# Altium PCB Peripheral.PcbDoc
Units mil, origin at the board's own origin, x right, y up, seen from the top; angles counter-clockwise.
Board outline 1750 x 2500 mil, 4 copper layers (Top Layer, Layer 1, Layer 2, Bottom Layer), stack 23.756 mil thick; 31 components, 22 nets, 98 pads, 30 vias.
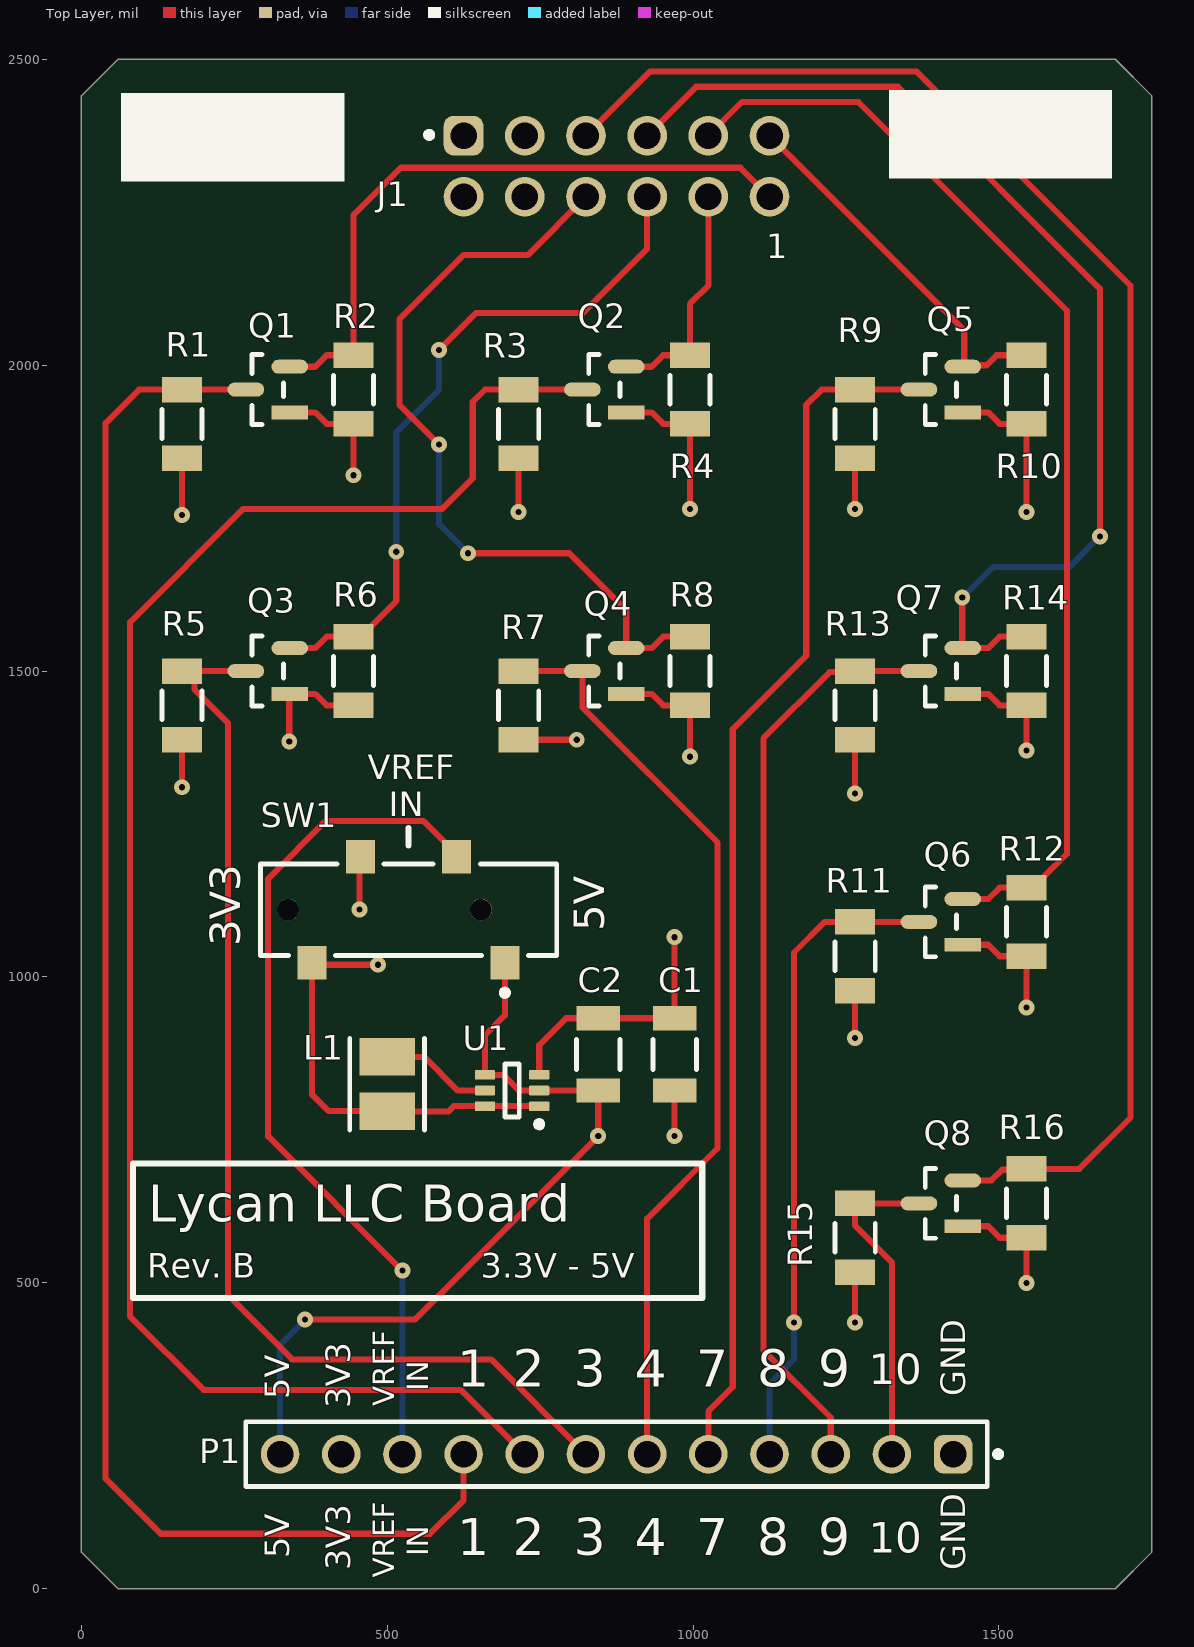
[diagram p0: Top Layer view]
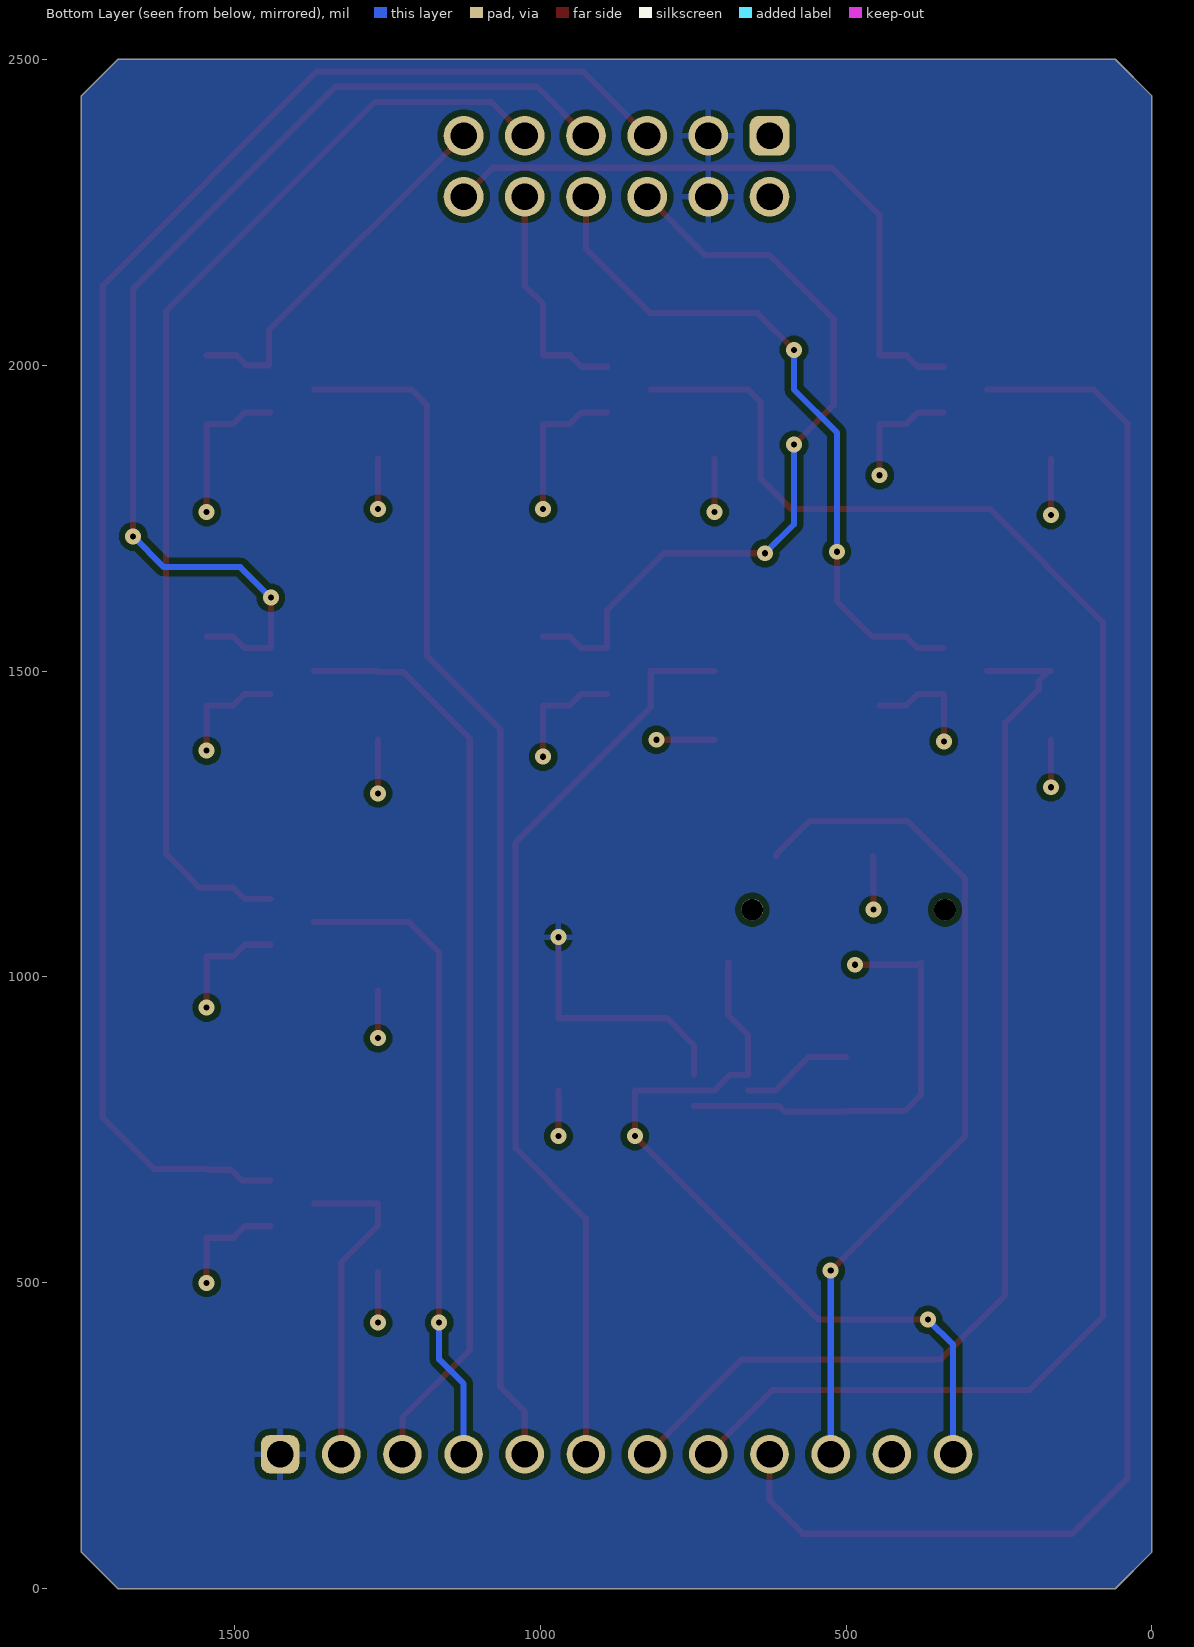
[diagram p1: Bottom Layer view, seen from below]
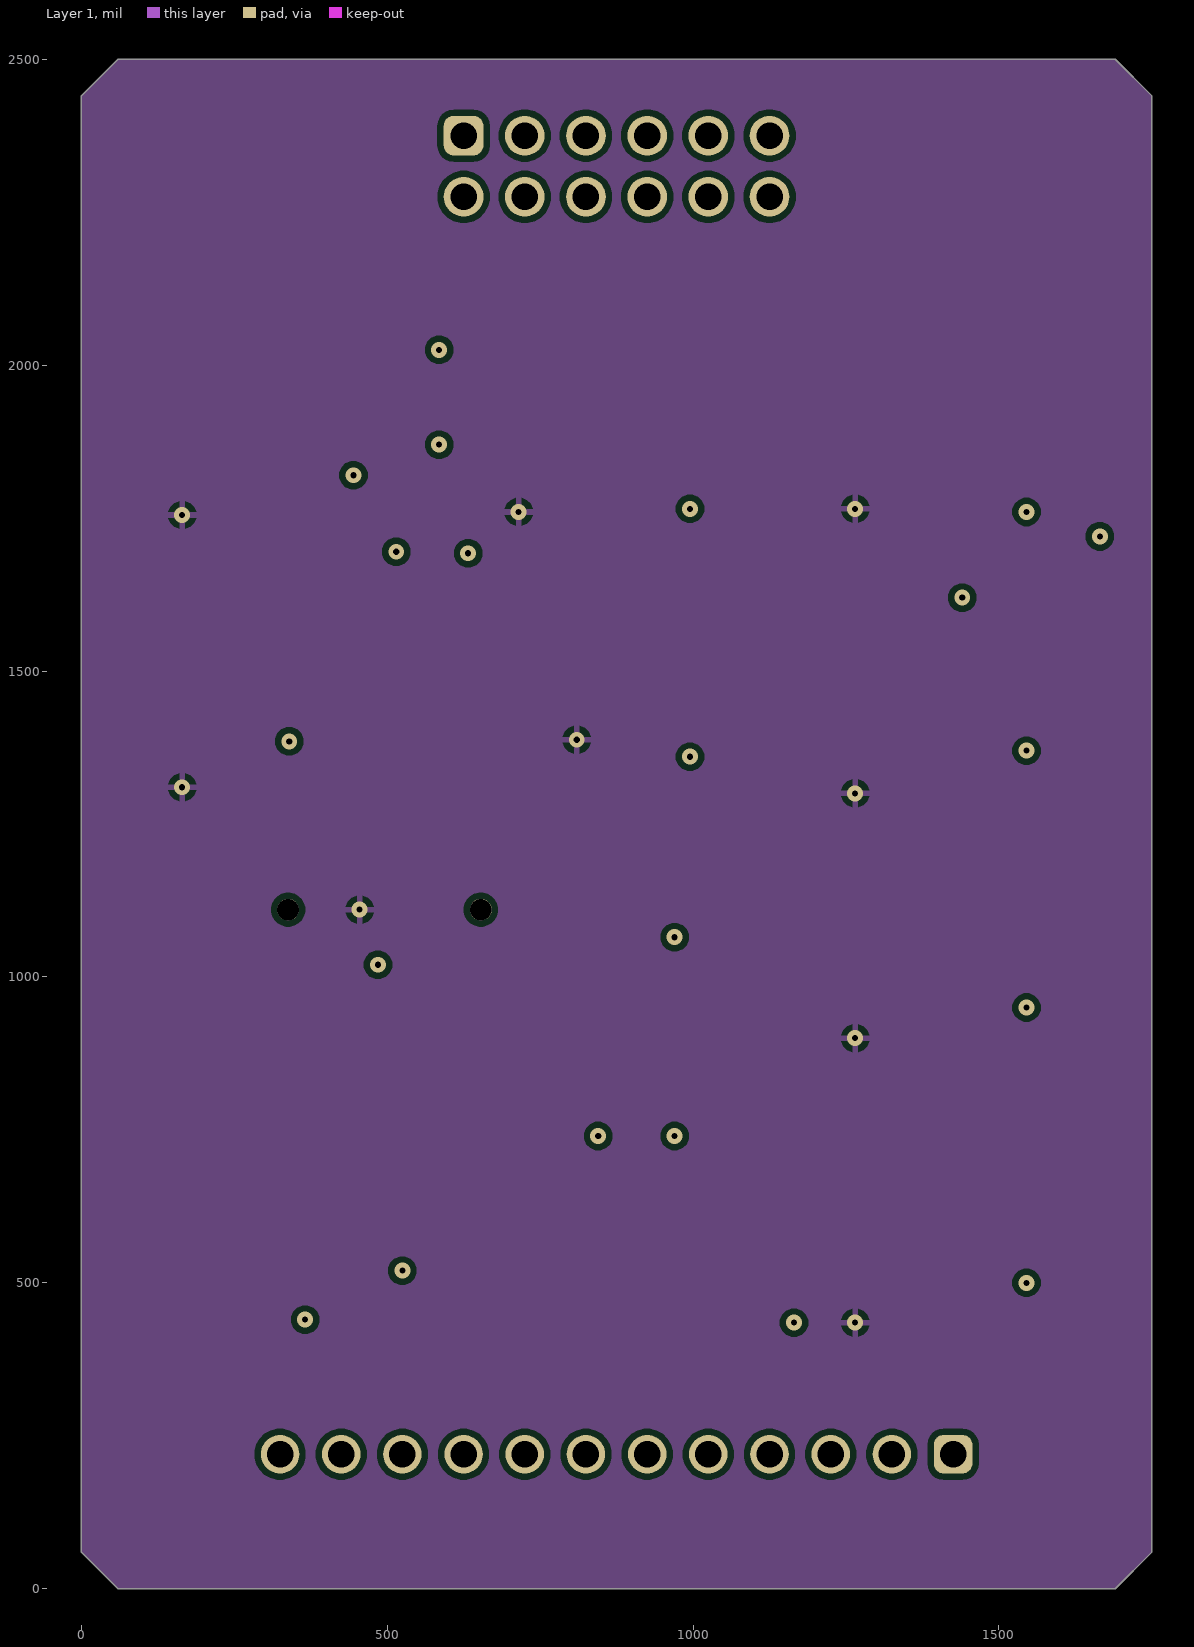
[diagram p2: Layer 1]
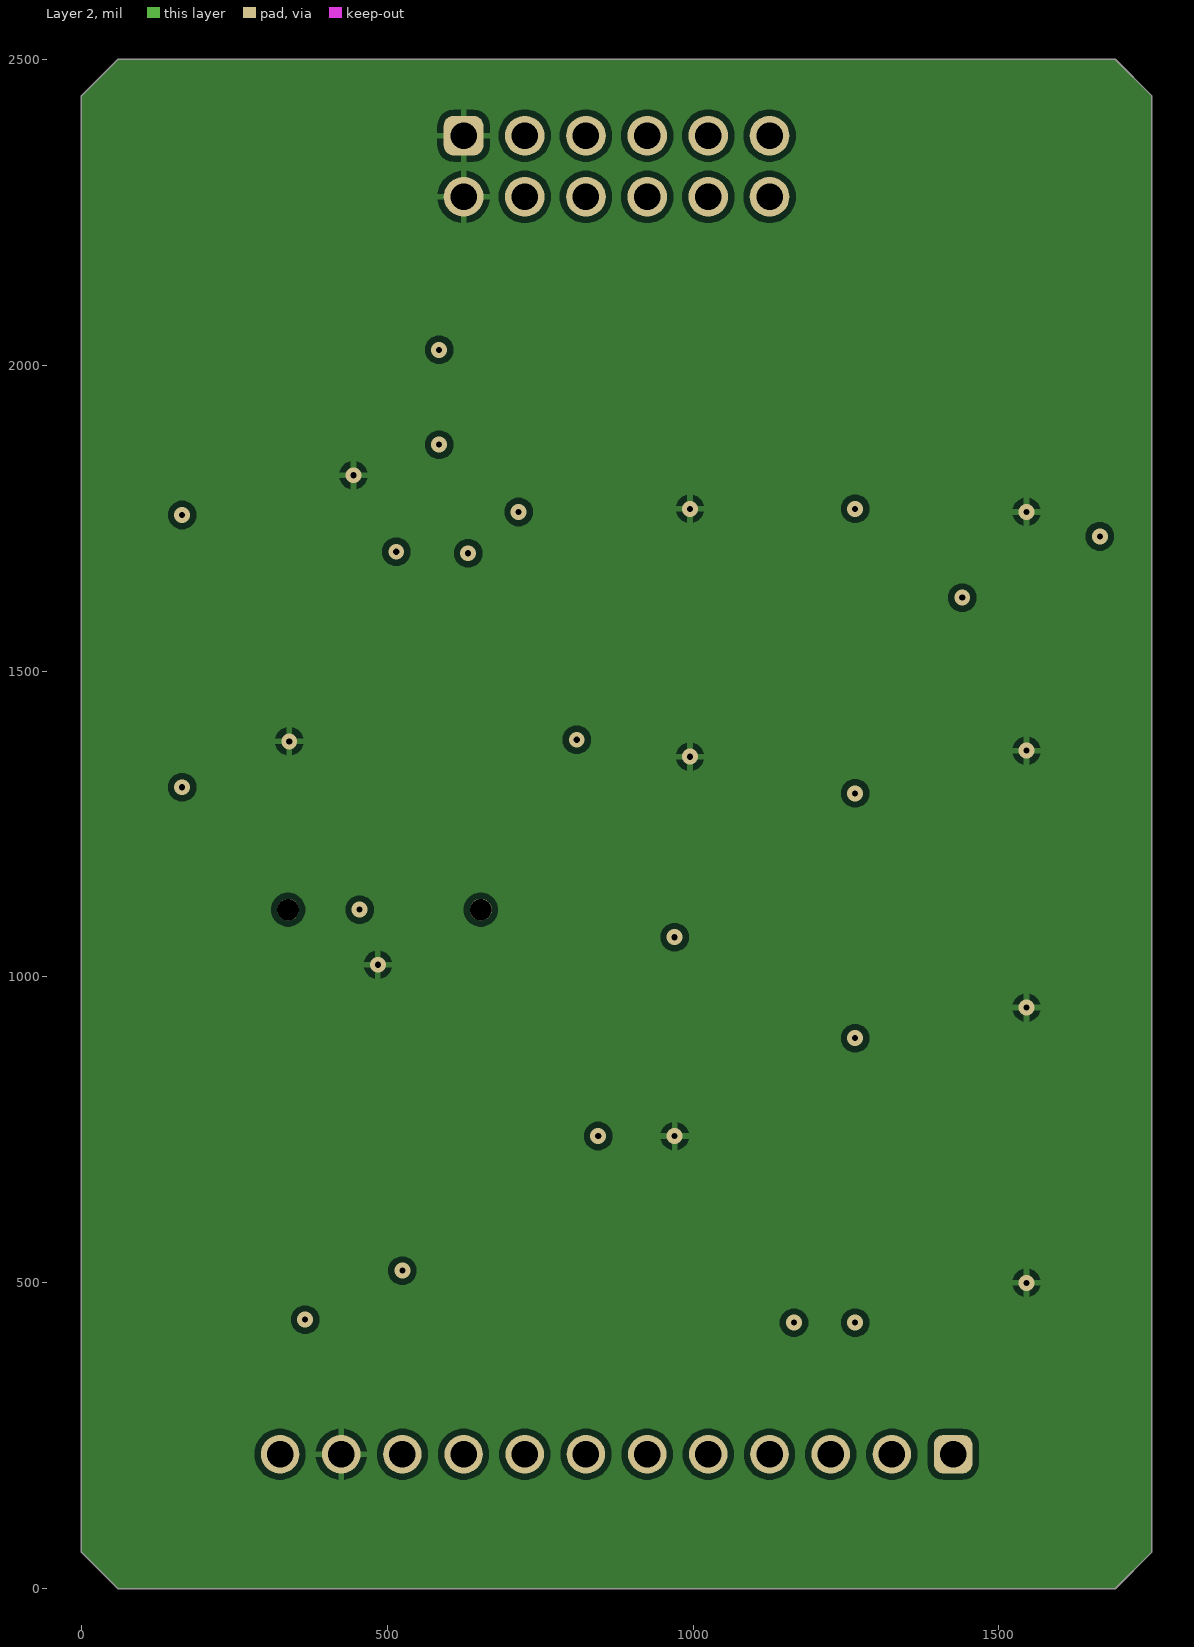
[diagram p3: Layer 2]
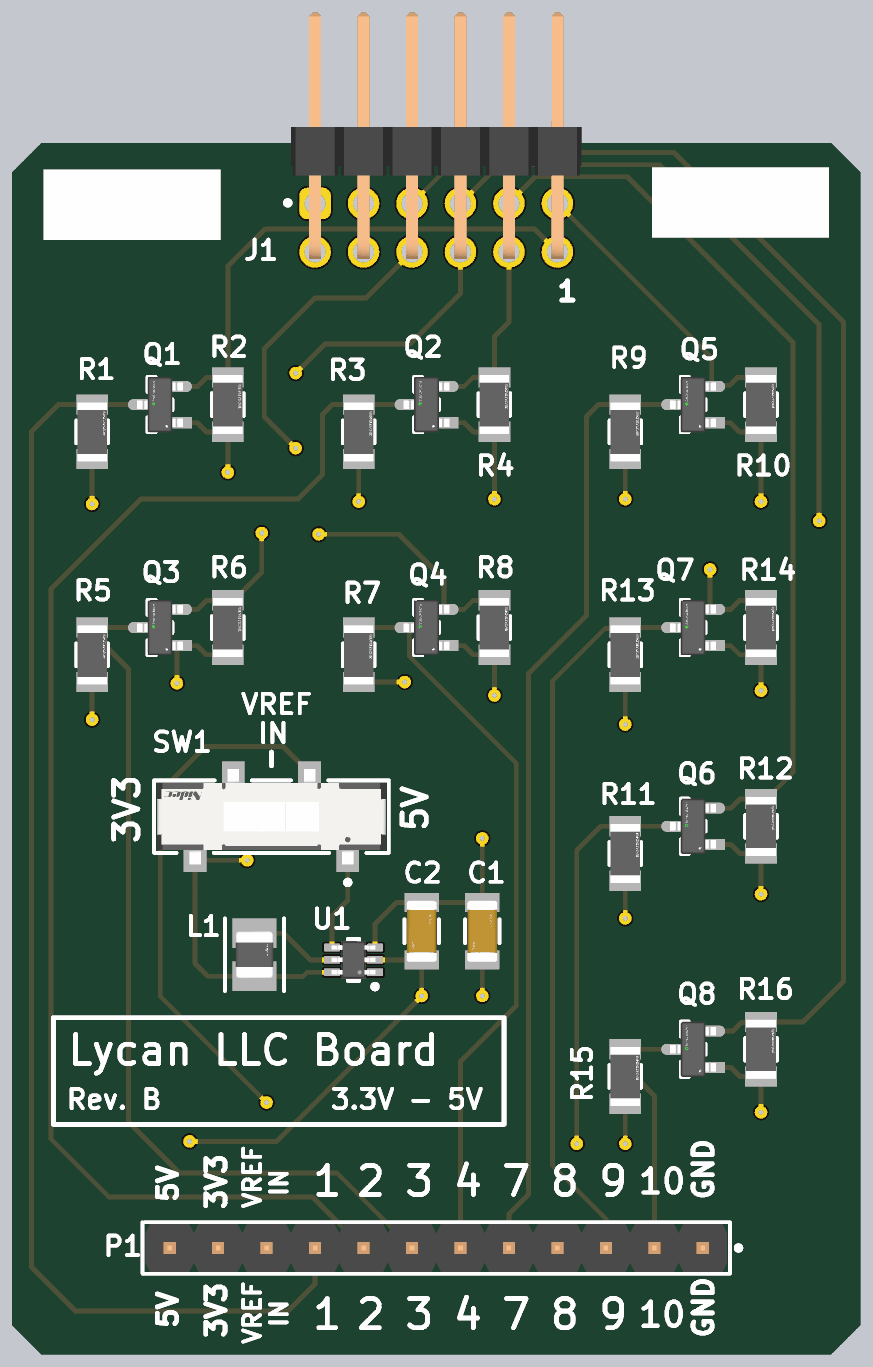
[diagram p4: 3D render of the assembled board from above, using the file's embedded part models]

## Layer stack, top to bottom
Top Solder: solder mask 0.4, Solder Resist, Dk 3.5
Top Layer: signal copper 1.4
Dielectric 2: prepreg 2.8, PP-006, Dk 4.1
Layer 1: signal copper 1.378
Dielectric 1: dielectric 12.6, FR-4, Dk 4.8
Layer 2: signal copper 1.378
Dielectric 3: prepreg 2.8, PP-006, Dk 4.1
Bottom Layer: signal copper 1.4
Bottom Solder: solder mask 0.4, Solder Resist, Dk 3.5

## Board outline
0,60 0,2440 60,2500 1690,2500 1750,2440 1750,60 1690,0 60,0

## Design rules (kind name [scope] priority, off if disabled: settings)
Clearance [All] p1: gap=10 ignorepadtopadclearanceinfootprint=FALSE
PolygonConnect [All] p1: connectstyle=Relief reliefconductorwidth=10 reliefentries=4 polygonreliefangle="90 Angle" airgapwidth=10
RoutingVias [All] p1: holewidth=28 width=50 viastyle="Through Hole" minholewidth=28 minwidth=50 maxholewidth=28 maxwidth=50
SolderMaskExpansion [All] p1: expansion=4 istentingtop=FALSE
SupplyNets "Schematic Supply Nets_4" [InNet('VREF')] p1: voltage=0.000
SupplyNets "Schematic Supply Nets_3" [InNet('VREF_IN')] p2: voltage=0.000
SupplyNets "Schematic Supply Nets_2" [InNet('GND')] p3: voltage=0.000
SupplyNets "Schematic Supply Nets_1" [InNet('3V3')] p4: voltage=0.000
SupplyNets "Schematic Supply Nets" [InNet('5V')] p5: voltage=0.000
Width [All] p1: maxlimit=30 minlimit=10 preferedwidth=10
30 further rules are at their usual default settings.

## Components (designator, comment, footprint, x,y, rotation, side; value= is the part's Value field where it differs from the comment)
C1 "CC1206KRX7R9BB103" FP-CC1206-1_25-MFG 970,873.46 r90 top value="10 nF"
C2 "CC1206KRX7R9BB103" FP-CC1206-1_25-MFG 845,873.46 r90 top value="10 nF"
J1 "61301221021" 61301221021 875,2482.48 r180 top
L1 "LQM2HPN4R7MG0L" FP-LQM2HPN_G0-IPC_A 500,825 r90 top
P1 "61301211121" 61301211121 875,220 r180 top
Q1 "BSS138" FP-318-08-IPC_B 305,1960 r180 top
Q2 "BSS138" FP-318-08-IPC_B 855,1960 r180 top
Q3 "BSS138" FP-318-08-IPC_B 305,1500 r180 top
Q4 "BSS138" FP-318-08-IPC_B 855,1500 r180 top
Q5 "BSS138" FP-318-08-IPC_B 1405,1960 r180 top
Q6 "BSS138" FP-318-08-IPC_B 1405,1090 r180 top
Q7 "BSS138" FP-318-08-IPC_B 1405,1500 r180 top
Q8 "BSS138" FP-318-08-IPC_B 1405,630 r180 top
R1 "CR1206-JW-103ELF" FP-CR1206-IPC_B 165,1903.82 r90 top
R2 "CR1206-JW-103ELF" FP-CR1206-IPC_B 445,1960 r90 top
R3 "CR1206-JW-103ELF" FP-CR1206-IPC_B 715,1903.82 r90 top
R4 "CR1206-JW-103ELF" FP-CR1206-IPC_B 995,1960 r90 top
R5 "CR1206-JW-103ELF" FP-CR1206-IPC_B 165,1443.82 r90 top
R6 "CR1206-JW-103ELF" FP-CR1206-IPC_B 445,1500 r90 top
R7 "CR1206-JW-103ELF" FP-CR1206-IPC_B 715,1443.82 r90 top
R8 "CR1206-JW-103ELF" FP-CR1206-IPC_B 995,1500 r90 top
R9 "CR1206-JW-103ELF" FP-CR1206-IPC_B 1265,1903.82 r90 top
R10 "CR1206-JW-103ELF" FP-CR1206-IPC_B 1545,1960 r90 top
R11 "CR1206-JW-103ELF" FP-CR1206-IPC_B 1265,1033.82 r90 top
R12 "CR1206-JW-103ELF" FP-CR1206-IPC_B 1545,1090 r90 top
R13 "CR1206-JW-103ELF" FP-CR1206-IPC_B 1265,1443.82 r90 top
R14 "CR1206-JW-103ELF" FP-CR1206-IPC_B 1545,1500 r90 top
R15 "CR1206-JW-103ELF" FP-CR1206-IPC_B 1265,573.82 r90 top
R16 "CR1206-JW-103ELF" FP-CR1206-IPC_B 1545,630 r90 top
SW1 "CL-SB-13B-02T" FP-CL-SB-13B-02T-MFG 535,1110 r180 top
U1 "TPS61222DCKT" DCK0006A_N 704.29,814.41 r180 top

## Footprints (in the part's own frame and the unit in brackets; to place one, negate y for a bottom-side part, rotate by r counter-clockwise, add the part's x,y. Pads: shape width x height; smd on the part's side, far side on the other; paste and mask are expansions set on the pad)
61301211121 [mm] "Pin Header, pitch 2.54 mm, THT, Vertical, single row, 12p"
  rrect50% 1.6x1.6 hole 1.1: 1(-13.97,0)
  round 1.6 hole 1.1: 2(-11.43,0) 3(-8.89,0) 4(-6.35,0) 5(-3.81,0) 6(-1.27,0) 7(1.27,0) 8(3.81,0) 9(6.35,0) 10(8.89,0) 11(11.43,0) 12(13.97,0)
  silkscreen extent -15.96,-1.35 15.39,1.35, body extent -15.24,-1.27 15.24,1.27, height 8.57
61301221021 [mm] "Pin Header, pitch 2.54 mm, THT, Angled, dual row, 12p"
  rrect50% 1.65x1.65 hole 1.1: 1(6.35,2.73)
  round 1.65 hole 1.1: 2(6.35,5.27) 3(3.81,2.73) 4(3.81,5.27) 5(1.27,2.73) 6(1.27,5.27) 7(-1.27,2.73) 8(-1.27,5.27) 9(-3.81,2.73) 10(-3.81,5.27) 11(-6.35,2.73) 12(-6.35,5.27)
  silkscreen extent 7.65,2.58 7.9,2.82, body extent -7.62,-7.27 7.62,5.63, height 5.12
DCK0006A_N [mm] "SOT23, 6-Leads, Body 2.15x1.4mm, Pitch 0.65mm, IPC Medium Density"
  rrect25% 0.85x0.4 smd: 1(-1.125,0.65) 2(-1.125,0) 3(-1.125,-0.65) 4(1.125,-0.65) 5(1.125,0) 6(1.125,0.65)
  silkscreen extent -1.25,-1.1 0.3,1.52, body extent -1.14,-1 1.14,1, height 0.94
FP-318-08-IPC_B [mm]
  rect 1.524x0.578 smd paste+0 mask+0: 1(-0.91,0.95)
  rrect100% 1.524x0.578 smd paste+0 mask+0: 2(-0.91,-0.95) 3(0.91,0)
  silkscreen extent -0.65,-1.45 0.65,1.45, body extent -1.92,-1.7 1.92,1.7, height 0.25
FP-CC1206-1_25-MFG [mm]
  rect 1x1.8 smd paste+0 mask+0: 1(-1.5,0) 2(1.5,0)
  silkscreen extent -0.63,-0.9 0.63,0.9, body extent -2.2,-1.25 2.2,1.25, height 0.25
FP-CL-SB-13B-02T-MFG [mm]
  rect 1.2x1.4 smd paste+0 mask+0: 1(-4,2.2) 2(-2,-2.2) 3(2,-2.2) 4(4,2.2)
  round 0.9 hole 0.9 unplated paste-2539.97 mask+0: ""(-3,0) ""(5,0)
  silkscreen extent -6.15,-1.9 6.15,3.57, body extent -6.25,-3 6.25,3, height 0.25
FP-CR1206-IPC_B [mil]
  rect 41.66x65.44 smd paste+0 mask+0: 1(-56.18,0) 2(56.18,0)
  silkscreen extent -24,-33 24,33, body extent -87,-43 87,43, height 10
FP-LQM2HPN_G0-IPC_A [mil]
  rect 61.22x90.8 smd paste+0 mask+0: 1(-44.32,0) 2(44.32,0)
  silkscreen extent -75,-61 75,61, body extent -95,-65 95,65, height 10

## Part data
C1 C2: library part CMP-1037-03511-2, "CAP CER 10000PF 50V X7R 1206", Capacitance="10 nF", Manufacturer=Yageo, Package=CC1206-1.25, Temperature="-55°C to +125°C", Temperature Characteristic=X7R, Temperature Coefficient=15%, Temperature Range High=+125°C, Temperature Range Low=-55°C, Tolerance=0.1, Voltage Rating="50 V", Automotive=No, Automotive Grade=NA, Category=Cap, ComponentLink2Description=Datasheet, ComponentLink2URL=http://www.yageo.com/documents/recent/UPY-NP0X7R_HV_1KV-to-3KV_11.pdf, Device Class L1="Passive Components", Device Class L2=Capacitors, Device Class L3="Ceramic Capacitors", Digikey Description="CAP CER 10000PF 50V X7R 1206", Footprint Url=http://www.yageo.com/exep/pages/download/literatures/UPY-C_GEN_24.pdf, Height=1.45mm, Lead Free=Yes, Manufacturer Part Number=CC1206KRX7R9BB103, Material=Ceramic, Mouser Description="Multilayer Ceramic Capacitors MLCC - SMD/SMT 10nF 50V X7R 10%", Octopart=https://octopart.com/cc1206krx7r9bb103-yageo-39467800, RoHS=TRUE
J1: library part CMP-1502-01087-3, Color=Black, Contact Resistance=20mΩ, Current Rating=3A, Operating Supply Voltage=250V, Connector Type="Male Pin", Contact Material=Copper, Contact Mating Length=5.9944mm, Contact Plating=Gold, Gender=Male, Lead Pitch=2.54mm, Mount="Through Hole", NexarPartId=32855539, Number of Contacts=12, Number of Pins=12, Number of Positions=12, Number of Rows=2, Packaging=Bulk, Pitch=2.54mm, REACH SVHC=Unknown, RoHS=Compliant, Row Spacing=2.54mm, Termination=Solder
L1: library part CMP-06042-016771-1, "Multilayer Type Inductor for Power Lines, 1008 (2520), 4.7μH, 20%, 0.138Ω, 1.1A", Case Code (Imperial)=1008, Case Code (Metric)=2520, Current Rating=1.1A, DC Resistance (DCR)=110mR, Inductance=4.7uH, Inductance Tolerance=20%, Max Operating Temperature=125°C, Min Operating Temperature=-55°C, Package Quantity=3000, Self Resonant Frequency=25MHz, Test Frequency=1MHz, Case/Package=1008, Core Material=Ferrite, DC Current=1.1A, Depth=2.2mm, Height=1.2mm, Height - Seated (Max)=0.039inch, Lead Free="Lead Free", Length=2.5mm, Max DC Current=1.1A, Military Standard=Not, Mount="Surface Mount", Packaging="Tape and Reel", Radiation Hardening=No, Rated Current-Max=1.1A, REACH SVHC="No SVHC", RoHS Compliant=Yes, Series=LQM2HP_G0, Shielding=Shielded, Termination=SMD/SMT, Tolerance=20%, Width=0.079inch
P1: library part CMP-1502-01086-3, Color=Black, Contact Resistance=20mΩ, Current Rating=3A, Operating Supply Voltage=250V, Connector Type="Male Pin", Contact Material=Copper, Contact Mating Length=5.9944mm, Contact Plating=Gold, Gender=Male, Lead Pitch=2.54mm, Mount="Through Hole", NexarPartId=32855538, Number of Contacts=12, Number of Pins=12, Number of Positions=12, Number of Rows=1, Orientation=Vertical, Packaging=Bulk, Pitch=2.54mm, REACH SVHC=Unknown, RoHS=Compliant, Termination=Solder
Q1 Q2 Q3 Q4 Q5 Q6 Q7 Q8: library part CMP-07173-000101-1, "MOSFET N-CH 50V 220MA SOT-23", Case/Package=SOT-23, Continuous Drain Current (ID)=220mA, Drain to Source Breakdown Voltage=50V, Drain to Source Resistance=3.5R, Gate to Source Voltage (Vgs)=20V, Input Capacitance=27pF, Max Operating Temperature=150°C, Max Power Dissipation=360mW, Min Operating Temperature=-55°C, On-State Resistance=6R, Package Quantity=1, Threshold Voltage=1.3V, Contact Plating=Tin, Current Rating=220mA, Drain to Source Voltage (Vdss)=50V, Dual Supply Voltage=50V, Element Configuration=Single, Fall Time=9ns, Height=0.93mm, Lead Free="Lead Free", Length=2.92mm, Mount="Surface Mount", Nominal Vgs=1.3V, Number of Elements=1, Number of Pins=3, Packaging="Tape and Reel", Power Dissipation=360mW, Radiation Hardening=No, Rds On Max=3.5R, REACH SVHC="No SVHC", Rise Time=9ns, Termination=SMD/SMT, Turn-Off Delay Time=20ns, Turn-On Delay Time=2.5ns, Voltage Rating (DC)=50V, Weight=0.03g, Width=1.3mm
R1 R2 R3 R4 R5 R6 R7 R8 R9 R10 R11 R12 R13 R14 R15 R16: library part CMP-07231-005593-1, "Thick Film Chip Resistors 1206 10kΩ 0.25W 5% 200ppm/°C", Case Code (Imperial)=1206, Case Code (Metric)=3216, Max Operating Temperature=155°C, Max Power Dissipation=250mW, Min Operating Temperature=-55°C, Package Quantity=1, Resistance=10k, Temperature Coefficient=200ppm/°C, Tolerance=5%, Voltage Rating=200V, Case/Package=1206, Composition="Thick Film", Contact Plating=Tin, Depth=1.6mm, Features="Moisture Resistant", Height=0.6mm, Length=3.2mm, Military Standard=Not, Mount="Surface Mount", Number of Pins=2, Number of Terminations=2, Packaging="Tape and Reel", Power Rating=250mW, Radiation Hardening=No, REACH SVHC="No SVHC", Termination=SMD/SMT, Thickness=610um, Voltage Rating (DC)=200V, Width=1.6mm
SW1: library part CMP-08360-77011255-1, "CL-SB-13B-02T Switch Slide ON-ON-ON SP3T Top 200mA 12VDC 10000Cycles Gullwing T/R", Contact Current Rating=200mA, Contact Resistance=70mΩ, Max Operating Temperature=85°C, Min Operating Temperature=-40°C, Voltage Rating (DC)=12V, Actuator Length=2mm, Actuator Material="Nylon, Polyamide", Contact Material=Copper, Contact Plating=Gold, Contact Style=Non-Shorting, Current Rating=200mA, Electrical Life=10kcycles, Height=6.1mm, Lead Free="Lead Free", Life (Cycles)=10kcycles, Mount="Surface Mount", NexarPartId=77011255, Orientation=Vertical, Packaging="Tape & Reel (TR)", RoHS=Compliant, Switch Function=On-On-On, Switch Travel=2mm, Termination="Gull Wing", Throw Configuration=SP3T
U1: library part CMP-0343-00079-2, "Boost Voltage Converter with 0.7 to 5.5 V Input and 5 V Output, -40 to 85 degC, 6-Pin SC70 (DCK), Green (RoHS & no Sb/Br)", Manufacturer="Texas Instruments", Switching Frequency(Max)(kHz)=2000, Code_JEDEC=MO-203-AB, ComponentLink1Description=Datasheet, ComponentLink1URL=http://www.ti.com/general/docs/lit/getliterature.tsp?genericPartNumber=TPS61222&fileType=pdf, ComponentLink2Description="Package Specification", ComponentLink2URL=http://www.ti.com/litv/pdf/mpds114c, DatasheetVersion=SLVS776, Eco-Plan="Green (RoHS & no Sb/Br)", Mounting Technology="Surface Mount", PackageDescription="6-Pin Plastic Small-Outline Package, 2 x 1.3 mm Body, 0.65 mm Pitch, 2.1 mm Lead Span", PackageReference=DCK0006A, PackageVersion="revG, Jan-2007", PartNumber=TPS61222DCKT, Regulated Outputs(#)=1, SubFamily="Step-Up Regulator", Topology=Boost, Vin(Max)(V)=5.5, Vin(Min)(V)=0.7, Vout(Max)(V)=5, Vout(Min)(V)=5

## Via types
v1: diameter 26, hole 10, Top Layer to Bottom Layer, 30 vias

## Nets (pads, with @x,y where several pads share a name; then routed paths per layer and width w, separated by ;. In a path a pad name is that pad's centre, name@x,y a point inside that pad or via, vN(x,y) a via of type N, cw(c..) or ccw(c..) an arc to the next point about the centre after c; other vN are vias at no path point)
3V3: C1.1 J1.1 J1.2 L1.1 P1.11 Q1.1 Q2.1 Q3.1 Q4.1 Q5.1 Q6.1 Q7.1 Q8.1 R2.1 R4.1 R6.1 R8.1 R10.1 R12.1 R14.1 R16.1 SW1.4 U1.1 U1.6 | length 2440.5
  Top Layer w10: v1(340,1385) 340,1461.76 Q3.1 382.4,1462.6 401.18,1443.82 R6.1 ; Q1.1 382.4,1922.6 401.18,1903.82 R2.1 v1(445,1820) ; v1(485,1020) 380.91,1020 SW1.4 377.52,807.48 404.32,780.68 L1.1 500.68,780 600,780 608.82,788.82 U1.6 U1.1 ; Q4.1 932.4,1462.6 951.18,1443.82 R8.1 v1(995,1360) ; Q2.1 932.4,1922.6 951.18,1903.82 R4.1 v1(995,1765) ; v1(970,740) C1.1 ; Q8.1 1482.4,592.6 1501.18,573.82 R16.1 v1(1545,500) ; Q6.1 1482.4,1052.6 1501.18,1033.82 R12.1 v1(1545,950) ; Q7.1 1482.4,1462.6 1501.18,1443.82 R14.1 v1(1545,1370) ; Q5.1 1482.4,1922.6 1501.18,1903.82 R10.1 v1(1545,1760)
5V: C2.1 P1.12 SW1.1 U1.2 U1.4 | length 1307.1
  Top Layer w10: v1(366.04,440) 545,440 v1(845,740) C2.1 U1.2 715.59,814.41 690,840 U1.4 660,905 692.48,937.48 SW1.1
  Bottom Layer w10: P1.12 325,398.96 v1(366.04,440)
GND: C1.2 C2.2 J1.3 J1.4 P1.1 U1.3 | length 420.7
  Top Layer w10: U1.3 748.58,888.58 792.52,932.52 C2.2 C1.2 v1(970,1065)
NetL1_2: L1.2 U1.5 | length 182.7
  Top Layer w10: L1.2 560.68,869.32 615.59,814.41 U1.5
PER_IN_1: P1.9 Q1.3 R1.2 | length 2697
  Top Layer w10: Q1.3 R1.2 95,1960 40,1905 40,180 130,90 570,90 625,145 P1.9
PER_IN_2: P1.8 Q2.3 R3.2 | length 2843
  Top Layer w10: P1.8 620,325 200,325 80,445 80,1580 265,1765 590,1765 640,1815 640,1940 660,1960 R3.2 Q2.3
PER_IN_3: P1.7 Q3.3 R5.2 | length 1850.4
  Top Layer w10: Q3.3 176.55,1500 169.97,1500 R5.2 169.14,1500 184.97,1484.17 184.97,1470.03 240,1415 240,480 345,375 670,375 P1.7
PER_IN_4: P1.6 Q4.3 R7.2 | length 1523.3
  Top Layer w10: R7.2 Q4.3 819.17,1440.83 1040,1220 1040,720 925,605 P1.6
PER_IN_7: P1.5 Q5.3 R9.2 | length 1975.8
  Top Layer w10: P1.5 1025,290 1065,330 1065,1405 1115,1455 1185,1525 1185,1935 1210,1960 R9.2 Q5.3
PER_IN_8: P1.4 Q6.3 R11.2 | length 1061.4
  Top Layer w10: v1(1165,435) 1165,1040 1215,1090 R11.2 Q6.3
  Bottom Layer w10: P1.4 1125,335 1165,375 v1(1165,435)
PER_IN_9: P1.3 Q7.3 R13.2 | length 1515.3
  Top Layer w10: P1.3 1225,280 1115,390 1115,1390 1223.14,1498.14 1263.14,1498.14 R13.2 Q7.3
PER_IN_10: P1.2 Q8.3 R15.2 | length 539
  Top Layer w10: P1.2 1325,533.5 1265,593.5 R15.2 Q8.3
PMOD_D1: J1.12 Q1.2 R2.2 | length 1072.5
  Top Layer w10: Q1.2 382.4,1997.4 401.18,2016.18 R2.2 445,2245 522.48,2322.48 1077.52,2322.48 J1.12
PMOD_D2: J1.10 Q2.2 R4.2 | length 383.2
  Top Layer w10: Q2.2 932.4,1997.4 951.18,2016.18 R4.2 995,2100 1025,2130 J1.10
PMOD_D3: J1.8 Q3.2 R6.2 | length 1139.1
  Top Layer w10: Q3.2 382.4,1537.4 401.18,1556.18 R6.2 456.89,1556.18 515,1614.29 v1(515,1695) ; v1(585,2025) 645,2085 820,2085 925,2190 J1.8
  Bottom Layer w10: v1(515,1695) 515,1890 585,1960 v1(585,2025)
PMOD_D4: J1.6 Q4.2 R8.2 | length 1287.6
  Top Layer w10: v1(585,1870) 520,1935 520,2075 624.74,2179.74 729.74,2179.74 J1.6 ; v1(632.5,1692.5) 797.5,1692.5 890.83,1599.17 Q4.2 932.4,1537.4 951.18,1556.18 R8.2
  Bottom Layer w10: v1(585,1870) 585,1740 v1(632.5,1692.5)
PMOD_D7: J1.11 Q5.2 R10.2 | length 615.5
  Top Layer w10: J1.11 1443.27,2056.73 1443.27,1999.84 1479.84,1999.84 1496.18,2016.18 R10.2
PMOD_D8: J1.9 Q6.2 R12.2 | length 1839.2
  Top Layer w10: J1.9 1080,2430 1270,2430 1611.18,2088.82 1611.18,1201.18 1572.72,1162.72 1572.72,1162.01 1556.89,1146.18 1501.18,1146.18 1482.4,1127.4 Q6.2
PMOD_D9: J1.7 Q7.2 R14.2 | length 1776.1
  Top Layer w10: J1.7 1005,2455 1335,2455 1665,2125 v1(1665,1720) ; v1(1440,1620) 1440,1538.24 Q7.2 1482.4,1537.4 1501.18,1556.18 R14.2
  Bottom Layer w10: v1(1440,1620) 1490,1670 1615,1670 v1(1665,1720)
PMOD_D10: J1.5 Q8.2 R16.2 | length 2755.1
  Top Layer w10: J1.5 930,2480 1365,2480 1715,2130 1715,770 1631.18,686.18 R16.2 1543.82,685 1505,685 1487.4,667.4 Q8.2
VREF: R1.1 R3.1 R5.1 R7.1 R9.1 R11.1 R13.1 R15.1 SW1.3 | length 770.6
  Top Layer w10: v1(165,1310) R5.1 ; v1(165,1755) R1.1 ; v1(455,1110) 455,1195.35 SW1.3 ; R7.1 v1(810,1387.64) ; v1(715,1760) R3.1 ; v1(1265,435) R15.1 ; v1(1265,900) R11.1 ; v1(1265,1300) R13.1 ; v1(1265,1765) R9.1
VREF_IN: P1.10 SW1.2 | length 1405.3
  Top Layer w10: v1(525,520) 305.43,739.57 305.43,1160.43 400,1255 559.29,1255 613.74,1200.55 SW1.2
  Bottom Layer w10: P1.10 v1(525,520)
pads on no net: SW1.

## Polygon pours and split planes (outlines as drawn)
VREF on Layer 1 "5V_Plane" (solid, pour order 6): 0,60 0,2440 60,2500 1690,2500 1750,2440 1750,60 1690,0 60,0
3V3 on Layer 2 "3V3_Plane" (solid, pour order 7): 0,60 0,2440 60,2500 1690,2500 1750,2440 1750,60 1690,0 60,0
GND on Bottom Layer "GND_Plane" (solid, pour order 8): 0,60 0,2440 60,2500 1690,2500 1750,2440 1750,60 1690,0 60,0

## Silkscreen, mask and mechanical layers (free items; w line width, h text height)
Top Overlay:
  region: 1685,2449.69 1320,2449.69 1320,2304.69 1685,2304.69
  rectangle: 65,2300 430,2445
  lines w10: 535,1215 535,1243.11 ; 85,475 1015,475 1015,695 85,695 85,475
  text "1" at 1120,2175 h40
  text "VREF" at 468,1323 h40
  text "IN" at 503,1263 h40
  text "5V" at 855,1075 h50 r90
  text "3V3" at 260,1050 h50 r90
  text "Lycan LLC Board" at 110,599.99 h60
  text "Rev. B" at 108,508 h40
  text "3.3V - 5V" at 653,508 h40
  text "10" at 1287.51,334 h50
  text "1" at 615,330 h60
  text "2" at 705.01,330 h60
  text "3" at 805.01,330 h60
  text "4" at 905.01,330 h60
  text "7" at 1005.01,330 h60
  text "8" at 1105.01,330 h60
  text "9" at 1205.01,330 h60
  text "IN" at 567,323 h35 r90
  text "GND" at 1445,315 h40 r90
  text "5V" at 340,310 h40 r90
  text "VREF" at 512,298 h35 r90
  text "3V3" at 440,295 h40 r90
  text "10" at 1287.51,59 h50
  text "1" at 615,55 h60
  text "2" at 705.01,55 h60
  text "3" at 805.01,55 h60
  text "4" at 905.01,55 h60
  text "7" at 1005.01,55 h60
  text "8" at 1105.01,55 h60
  text "9" at 1205.01,55 h60
  text "IN" at 567,53 h35 r90
  text "5V" at 340,50 h40 r90
  text "3V3" at 440,30 h40 r90
  text "GND" at 1445,30 h40 r90
  text "VREF" at 512,18 h35 r90
Mechanical 1:
  lines w10: -150,59.09 -130,-0.91 ; -150,2439.09 -130,2499.09 ; -140,-0.91 -120,-0.91 ; -140,2499.09 -120,2499.09 ; -130,968.17 -130,-0.91 ; -130,1530 -130,2499.09 ; -110,59.09 -130,-0.91 ; -110,2439.09 -130,2499.09 ; -0.92,-85 -0.92,-65 ; 0,75 0,85 ; 59.08,-95 -0.92,-75 ; 59.08,-55 -0.92,-75 ; 65,0 70,0 ; 598.17,-75 -0.92,-75 ; 1150,-75 1749.08,-75 ; 1689.08,-95 1749.08,-75 ; 1689.08,-55 1749.08,-75 ; 1749.08,-85 1749.08,-65 ; 0,60 60,0 1690,0 1750,60 1750,2440 1690,2500 60,2500 0,2440 0,60
  text "2500 (mil)" at -94.01,978.17 h60 r90
  text "1750 (mil)" at 608.17,-110.99 h60